# EAGLE board HB-UNI-Sen-PM_v1 (EAGLE 8.7.1)
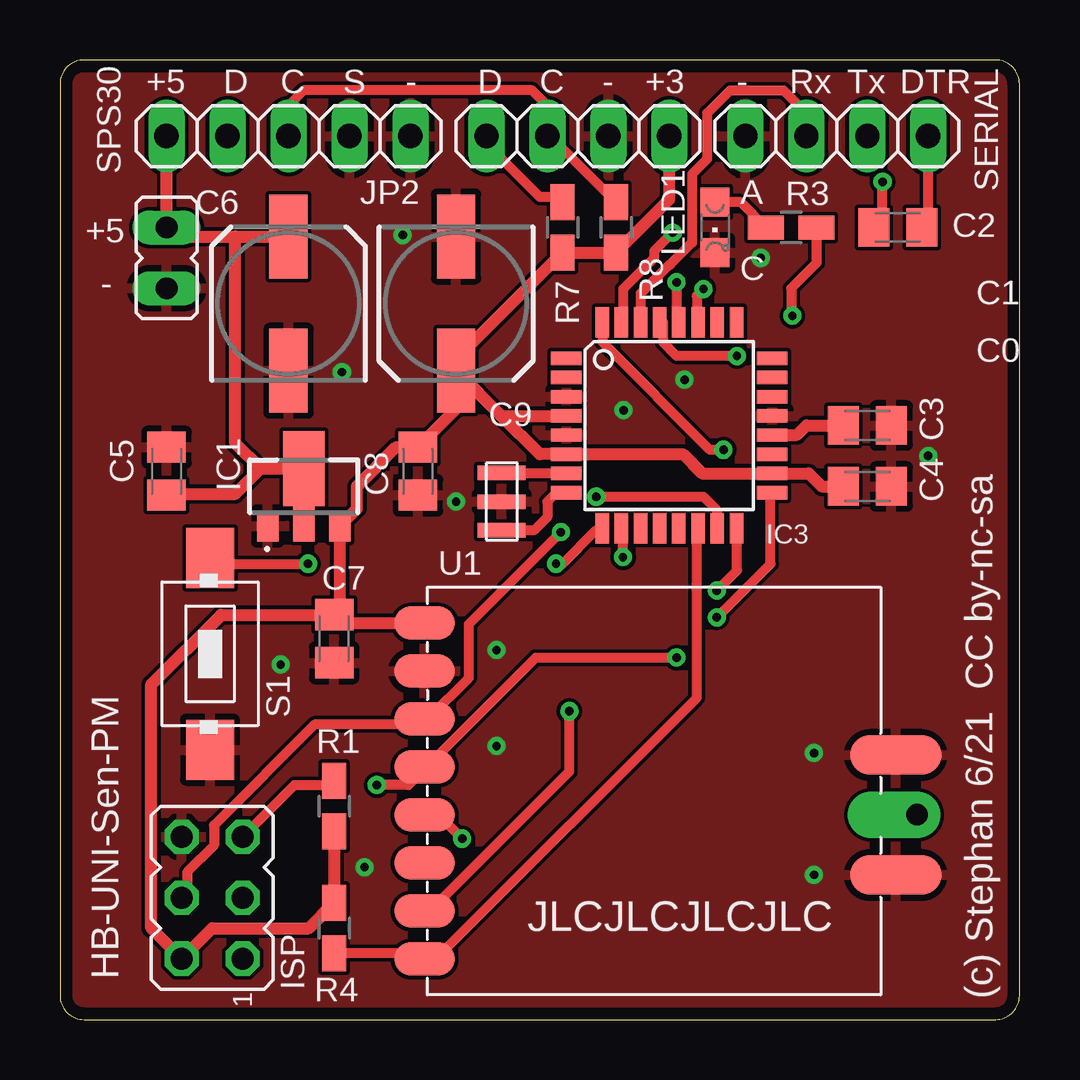
[diagram p0: board, top side]
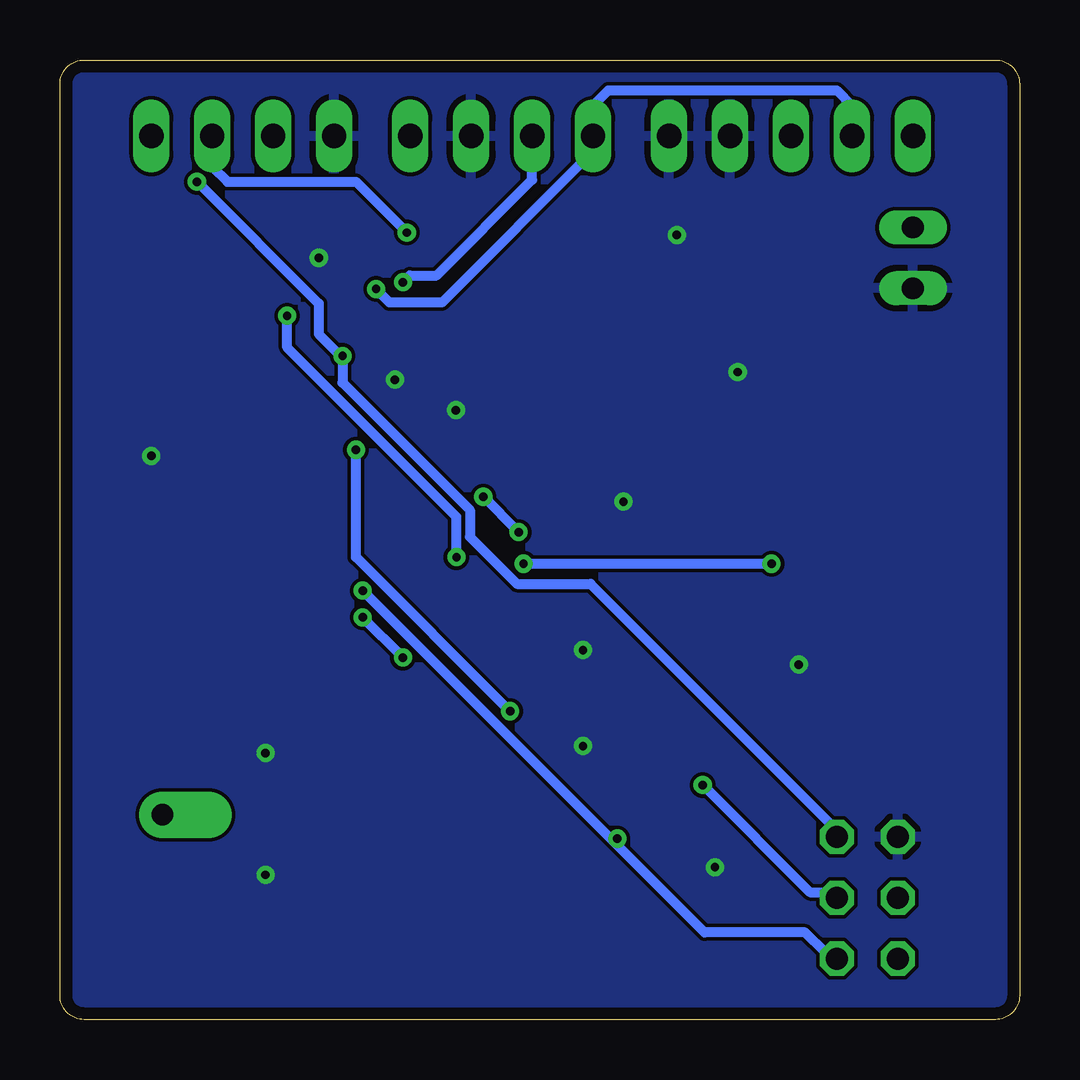
[diagram p1: board, bottom side, seen from below]

Size 40 x 40 mm. Coordinates in mm from the lower left corner, seen from the top.
Outline: 0,39 0,1 arc90 1,0 39,0 arc90 40,1 40,39 arc90 39,40 1,40 arc90 0,39
Copper layers (1*16): Top 0.035mm / dielectric 1.5mm / Bottom 0.035mm
Design rules "DRC17Jun21 *": minimum track width 16mil, minimum drill 0.35mm, track to track 6mil, track to pad 6mil, pad to pad 6mil, via to via 6mil, smd to smd 6mil, copper to edge 20mil, drill to drill 6mil, minimum pad ring 10mil, minimum via ring 8mil, stop-mask expansion 4mil, vias tented up to drill 16mil, thermal gap 10mil

## Footprints (pad centres in the part's own frame; a part is rotated, then mirrored left to right if it is on the bottom)
JP1 = drill 0.914 long: 1 0,-1.27; 2 0,1.27
C0805K = smd 1.3 x 1.6: 1 -1,0; 2 1,0
SANYO-OSCON_SMD_C6 = smd 3.5 x 1.6: + 2.8,0; - -2.8,0
MCP1700T-3302E/MB = smd 0.9 x 1.3: 1 -1.5,-1.65; 3 1.5,-1.65 | smd 0.9 x 1.475: 2 0,-1.562 | smd 1.733 x 3.125: 4 0,0.738
TQFP32-08 = smd 1.27 x 0.559: 1 -4.293,2.8; 2 -4.293,2; 3 -4.293,1.2; 4 -4.293,0.4; 5 -4.293,-0.4; 6 -4.293,-1.2; 7 -4.293,-2; 8 -4.293,-2.8; 17 4.293,-2.8; 18 4.293,-2; 19 4.293,-1.2; 20 4.293,-0.4; 21 4.293,0.4; 22 4.293,1.2; 23 4.293,2; 24 4.293,2.8 | smd 0.559 x 1.27: 9 -2.8,-4.293; 10 -2,-4.293; 11 -1.2,-4.293; 12 -0.4,-4.293; 13 0.4,-4.293; 14 1.2,-4.293; 15 2,-4.293; 16 2.8,-4.293; 25 2.8,4.293; 26 2,4.293; 27 1.2,4.293; 28 0.4,4.293; 29 -0.4,4.293; 30 -1.2,4.293; 31 -2,4.293; 32 -2.8,4.293
JP3Q = drill 0.914 octagon: 1 -2.54,-1.27; 2 -2.54,1.27; 3 0,-1.27; 4 0,1.27; 5 2.54,-1.27; 6 2.54,1.27
1X04 = drill 1.016 long: 1 -3.81,0; 2 -1.27,0; 3 1.27,0; 4 3.81,0
CHIPLED_0805 = smd 1.2 x 1.2: A 0,-1.05; C 0,1.05
CSTCE = smd 0.6 x 2: GND 0,0; IN 1.2,0; OUT -1.2,0
R0805W = smd 1.5 x 1: 1 -1.052,0; 2 1.052,0
SMDSWITCH6X4 = smd 2.5 x 2: 1 -4,2; 2 4,2
1X05 = drill 1.016 long: 1 -5.08,0; 2 -2.54,0; 3 0,0; 4 2.54,0; 5 5.08,0
CC1101-SMD = drill 0.9 pad 1.93 offset: ANT 10.965,-0.984 | smd 2.54 x 1.4: CSN -9.565,-7; GDO0 -9.565,-5; GDO2 -9.565,-3; GND0 -9.565,5; SCLK -9.565,1; SI -9.565,3; SO -9.565,-1; VCC -9.565,7 | smd 3.81 x 1.65: GND1 10.075,-3.5; GND2 10.075,1.5

## Placement (x,y rotation side)
BATT  5V  [JP1]  4.45,31.75 0 top
C2  100n  [C0805K]  34.92,33.02 180 top
C3  100n  [C0805K]  33.66,24.77 0 top
C4  100n  [C0805K]  33.66,22.23 0 top
C5  100n  [C0805K]  4.45,22.86 90 top
C6  100u Ta  [SANYO-OSCON_SMD_C6]  9.53,29.84 90 top
C7  10u  [C0805K]  11.43,15.88 270 top
C8  100n  [C0805K]  14.92,22.86 270 top
C9  100u Ta  [SANYO-OSCON_SMD_C6]  16.51,29.84 270 top
IC1  MCP1700T-3302E_MB  [MCP1700T-3302E/MB]  10.16,22.23 0 top
IC3  MEGA8-AI  [TQFP32-08]  25.4,24.77 0 top
ISP  ISP  [JP3Q]  6.35,5.08 90 top
JP2  I2C  [1X04]  21.59,36.83 0 top
LED1  gn  [CHIPLED_0805]  27.3,33.02 180 top
Q1  CSTCE  [CSTCE]  18.41,21.59 90 top
R1  10k  [R0805W]  11.43,8.89 270 top
R3  220R  [R0805W]  30.48,33.02 180 top
R4  10k  [R0805W]  11.43,3.81 90 top
R7  10k  [R0805W]  20.95,33.02 90 top
R8  10k  [R0805W]  23.18,33.02 90 top
S1  SMDSWITCH6X4  [SMDSWITCH6X4]  8.26,15.24 90 top
SERIAL  serial  [1X04]  32.38,36.83 0 top
SPS30  SPS30  [1X05]  9.53,36.83 0 top
U1  CC1101SMD  [CC1101-SMD]  24.77,9.53 0 top

## Library data of the parts
BATT ISP = jumper
C2-C5 C7 C8 R1 R3 R4 R7 R8 = resistor
C6 C9 = rcl; SPICEPREFIX: C
IC1 = SamacSys_Parts; ARROW_PART_NUMBER: MCP1700T-3302E/MB; ARROW_PRICE-STOCK: https://www.arrow.com/en/products/mcp1700t-3302emb/microchip-technology; DESCRIPTION: LDO voltage regulator 250mA Isupply 1uA; HEIGHT: mm; MANUFACTURER_NAME: Microchip; MANUFACTURER_PART_NUMBER: MCP1700T-3302E/MB; MOUSER_PART_NUMBER: 579-MCP1700T3302E/MB; MOUSER_PRICE-STOCK: https://www.mouser.co.uk/ProductDetail/Microchip-Technology/MCP1700T-3302E-MB/?qs=WWgnj3qycfnlJJhwyn%2Fifw%3D%3D
IC3 = atmel; MPN: ATMEGA8-16AU; OC_FARNELL: 9171371; OC_NEWARK: 73M8863
JP2 SERIAL SPS30 = pinhead
LED1 = led
Q1 = murata-cstcc-cstce-cstcr-cstcv-resonators
S1 = StephansLib
U1 = modules

## Nets
3V3: C4.1 C7.1 C8.1 C9.+ IC1.3 IC3.4 IC3.6 IC3.18 ISP.2 JP2.4 R1.2 R4.2 R7.1 R8.1 U1.VCC
5V: BATT.2 C5.1 C6.+ IC1.2 IC1.4 SPS30.1
AREF: C3.1 IC3.20
CSN: IC3.14 R4.1 U1.CSN
DTR: C2.1 SERIAL.4
GDO0: IC3.32 U1.GDO0
GND: BATT.1 C3.2 C4.2 C5.2 C6.- C7.2 C8.2 C9.- IC1.1 IC3.3 IC3.5 IC3.21 ISP.6 JP2.3 LED1.C Q1.GND S1.1 SERIAL.1 SPS30.4 SPS30.5 U1.GND0 U1.GND1 U1.GND2
LED1: LED1.A R3.2
MISO: IC3.16 ISP.1 U1.SO
MOSI: IC3.15 ISP.4 U1.SI
PD5: IC3.9 S1.2
PD6: IC3.10 R3.1
RESET: C2.2 IC3.29 ISP.5 R1.1
RXD: IC3.30 SERIAL.2
SCL: IC3.28 JP2.2 R8.2 SPS30.3
SCLK: IC3.17 ISP.3 U1.SCLK
SDA: IC3.27 JP2.1 R7.2 SPS30.2
TXD: IC3.31 SERIAL.3
XTAL1: IC3.7 Q1.IN
XTAL2: IC3.8 Q1.OUT

## Tracks (layer width: path | path; a pad name or v marks a point on that pad's centre or on a via)
3V3
  Top 0.508: C7.1 11.78,16.52 U1.VCC | C4.1 31.75,22.23 31.21,22.77 IC3.18 26.77,22.77 25.96,23.57 IC3.6 19.99,23.57 18.39,25.16 | C7.1 6.71,16.88 3.81,13.97 3.81,3.81 ISP.2 6.35,3.81 10.38,3.81 R4.2 R1.2 | C9.+ 16.51,25.45 C8.1 14.02,23.86 12.38,22.23 12.38,21.3 IC1.3 11.66,17.11 C7.1 | C9.+ 18.39,25.16 | 18.39,25.16 IC3.4 | C9.+ 16.51,27.52 R7.1 R8.1 25.4,34.19 JP2.4
5V
  Top 0.508: SPS30.1 BATT.2 4.82,32.65 7.3,32.65 | 7.3,32.65 C6.+ | C5.1 4.49,21.91 7.3,21.91 8.36,22.96 | 8.36,22.96 IC1.4 IC1.2 | 8.36,22.96 7.3,24.02 7.3,32.65
AREF
  Top 0.508: IC3.20 30.71,24.36 31.11,24.77 C3.1
CSN
  Top 0.406: R4.1 14.97,2.76 U1.CSN 15.37,2.79 15.93,2.79 26.54,13.41 26.54,20.4 IC3.14
DTR
  Top 0.406: C2.1 36.2,33.29 SERIAL.4
GDO0  (via drill 0.35)
  Top 0.406: v27.66,23.75 27.1,23.75 22.63,28.22 22.63,29.06 IC3.32 | v21.23,12.85 21.23,10.34 15.37,4.47 U1.GDO0
  Bottom 0.406: v27.66,23.75 27.66,19.28 v21.23,12.85
GND  (via drill 0.35)
  other vias: 26.04,26.67 23.5,25.4 36.2,23.5 18.2,15.4 18.2,11.4 9.2,14.8 16.51,21.59 29.21,31.75 14.29,32.7 11.75,26.99 31.43,11.11 31.43,6.03 12.7,6.35
  pour Top: 0,40.01 40.01,40.01 40.01,0 0,0
  pour Bottom: -1.27,41.91 41.91,41.91 41.91,-1.27 -1.27,-1.27
LED1
  Top 0.406: R3.2 28.38,34.07 LED1.A
MISO  (via drill 0.35)
  Top 0.406: v27.38,17.88 28.22,18.72 28.22,20.4 IC3.16 | v16.76,7.54 15.93,8.38 15.37,8.38 U1.SO
  Bottom 0.406: 16.9,7.4 13.13,3.63 8.94,3.63 8.1,2.79 8.1,2.52 7.82,2.52 ISP.1 | 16.9,7.4 v27.38,17.88 | v16.76,7.54 16.9,7.4
MOSI  (via drill 0.35)
  Top 0.406: v22.35,21.79 26.82,21.79 27.38,21.23 27.38,20.68 IC3.15 | v20.88,20.32 17.04,16.48 17.04,14.25 15.37,12.57 U1.SI 15.09,12.29 10.62,12.29 6.43,8.1 6.43,7.26 5.31,6.15 5.31,5.31 ISP.4
  Bottom 0.406: v20.88,20.32 v22.35,21.79
PD5  (via drill 0.35)
  Top 0.406: v20.68,19 20.95,19 22.35,20.4 IC3.9 | v10.34,19 6.43,19 S1.2
  Bottom 0.406: v10.34,19 v20.68,19
PD6  (via drill 0.35)
  Top 0.406: v23.47,19.28 23.47,20.4 IC3.10 | 31.29,32.97 R3.1 31.53,31.53 30.48,30.48 30.48,29.39 v30.53,29.34
  Bottom 0.406: v23.47,19.28 23.47,20.95 30.53,28.02 v30.53,29.34
RESET  (via drill 0.35)
  Top 0.406: ISP.5 9.78,9.78 11.18,9.78 R1.1 | v28.22,27.66 25.7,27.66 25.15,28.22 25.15,29.06 IC3.29 | C2.2 34.29,33.38 v34.29,34.92
  Bottom 0.406: ISP.5 7.82,7.82 7.82,8.1 17.88,18.16 20.95,18.16 22.91,20.12 22.91,21.23 28.22,26.54 v28.22,27.66 28.3,27.66 29.21,28.57 29.21,29.84 v34.29,34.92
RXD
  Top 0.406: SERIAL.2 31.11,37.78 30.16,38.73 27.94,38.73 26.99,37.78 26.99,35.88 26.35,35.24 26.35,32.38 25.43,31.47 25.4,31.47 24.2,30.27 IC3.30
SCL  (via drill 0.35)
  Top 0.406: v25.7,30.73 25.7,29.06 IC3.28 | JP2.2 20.32,38.1 19.68,38.73 10.16,38.73 9.53,38.1 SPS30.3 | 20.32,35.98 20.32,36.51 | 20.32,36.51 JP2.2 | 20.32,36.61 JP2.2 | R8.2 20.74,36.51 20.32,36.51
  Bottom 0.406: v25.7,30.73 25.43,31.01 24.31,31.01 20.32,35 JP2.2
SCLK  (via drill 0.35)
  Top 0.406: v27.38,16.76 29.62,19 29.62,21.79 IC3.17 | v25.7,15.09 19.84,15.09 15.37,10.62 U1.SCLK 15.09,10.34 14.53,9.78 v13.21,9.78
  Bottom 0.406: v25.7,15.09 v27.38,16.76 | v13.21,9.78 8.74,5.31 7.82,5.31 ISP.3
SDA  (via drill 0.35)
  Top 0.406: v26.82,30.45 26.54,30.18 26.54,29.06 IC3.27 | 17.78,36.2 JP2.1 | 17.78,36.61 JP2.1 | R7.2 20.74,34.29 20,34.29 17.78,36.51 JP2.1
  Bottom 0.406: v26.82,30.45 26.26,29.9 24.08,29.9 17.78,36.2 JP2.1 17.78,38.1 17.14,38.73 7.62,38.73 6.99,38.1 SPS30.2
TXD  (via drill 0.35)
  Top 0.406: IC3.31 23.47,29.06 23.47,30.45 24.77,31.75 24.77,32.03 v25.54,32.8
  Bottom 0.406: SERIAL.3 33.66,35.56 33.02,34.92 27.66,34.92 v25.54,32.8
XTAL1
  Top 0.406: IC3.7 18.44,22.77 Q1.IN
XTAL2
  Top 0.406: IC3.8 20.7,21.96 20.32,21.59 20.32,20.95 19.75,20.39 Q1.OUT

## Text on the board
tNames: +5 | D | C | S | - | D | C | - | +3 | - | Rx | Tx | DTR | A | +5 | - | C | C1 | C0 | JLCJLCJLCJLC | HB-UNI-Sen-PM | (c) Stephan 6/21 CC by-nc-sa